# Altium PCB RasPi-BplusHAT-RELAY.PcbDoc
Units mil, origin at the board's own origin, x right, y up, seen from the top; angles counter-clockwise.
Board outline 2560 x 2205 mil, 2 copper layers (Top, Bottom), stack 61.811 mil thick; 65 components, 55 nets, 220 pads, 18 vias.
Unrouted connection lines stored in the file: 1.
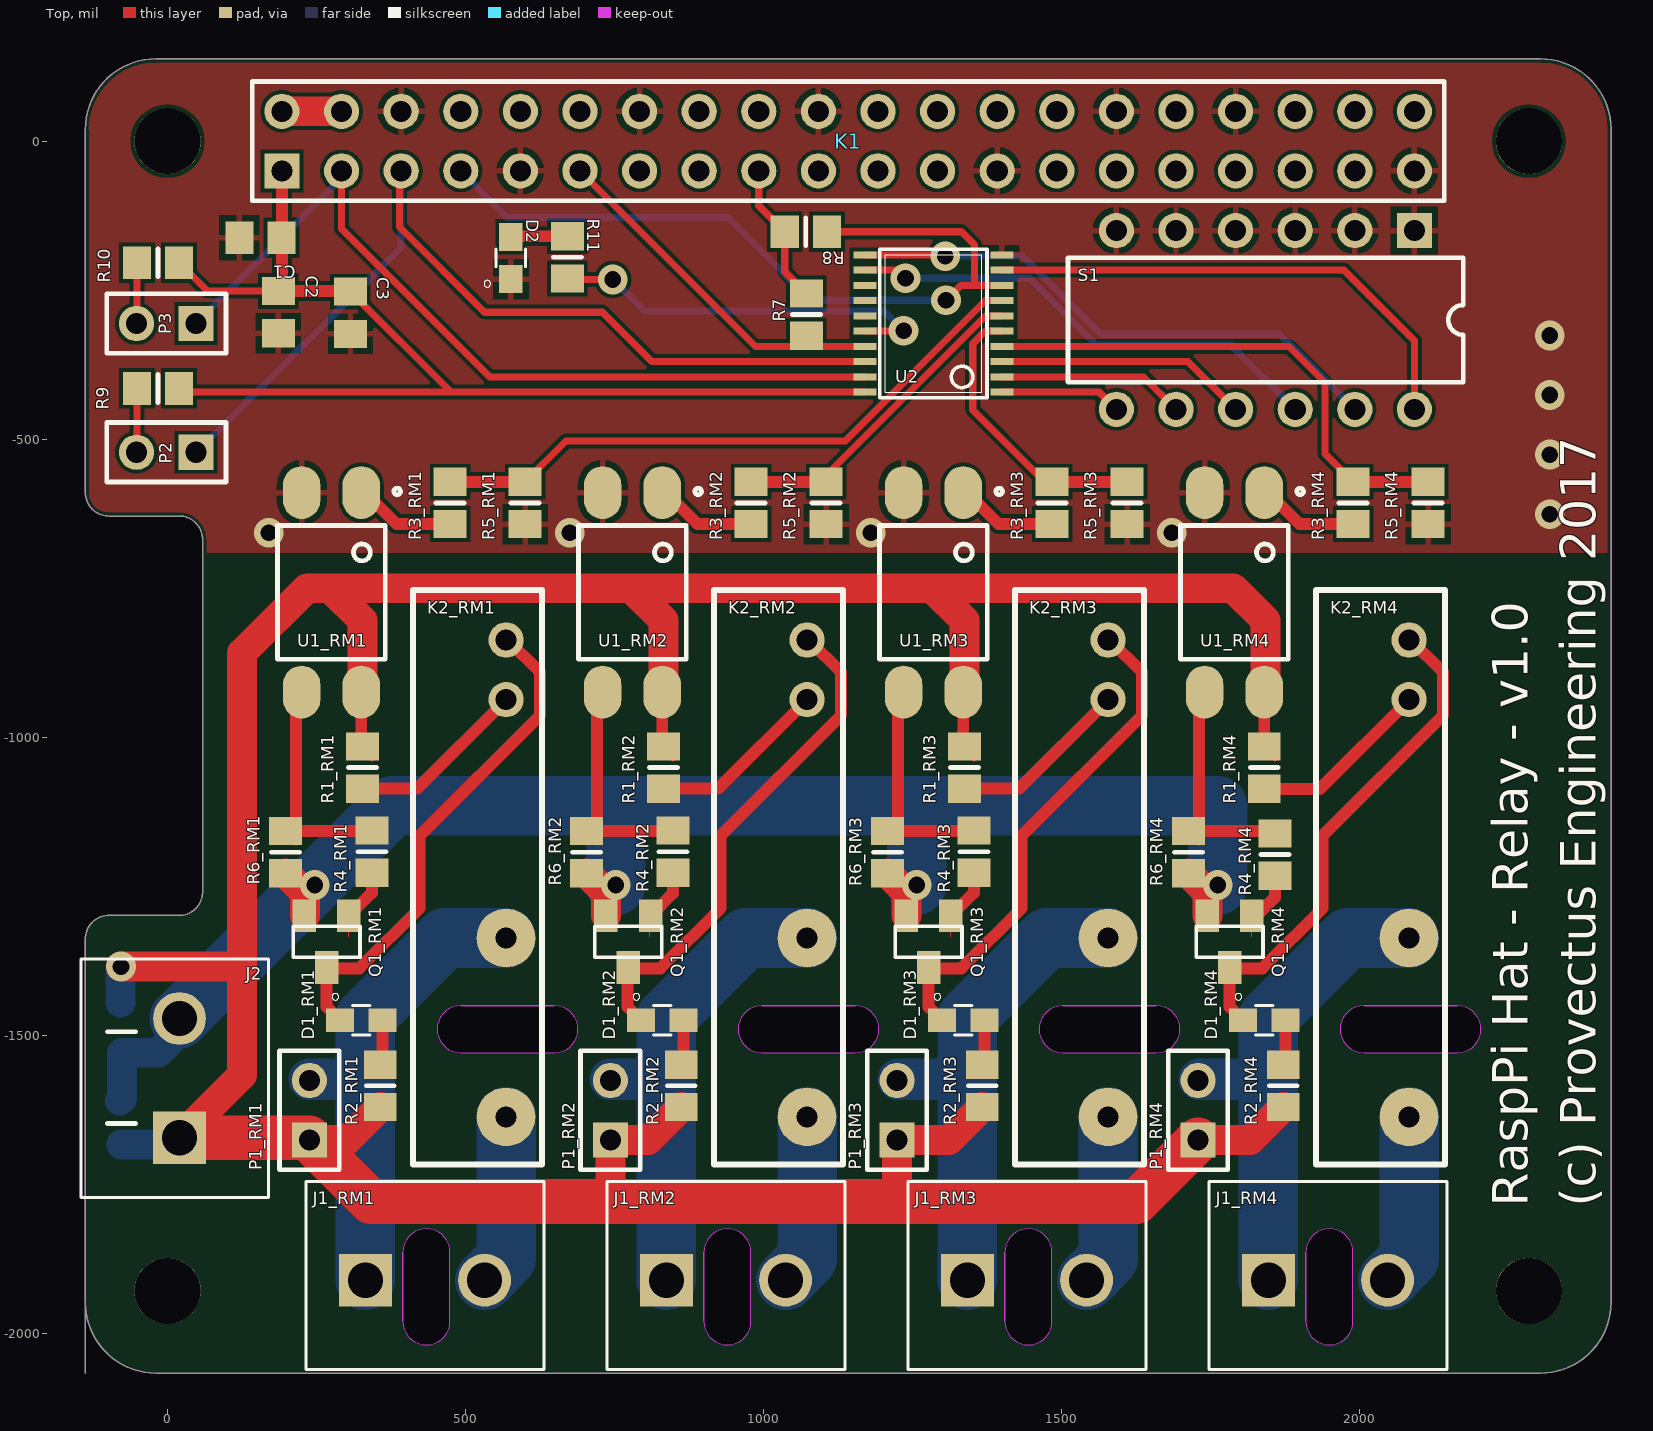
[diagram p0: Top view]
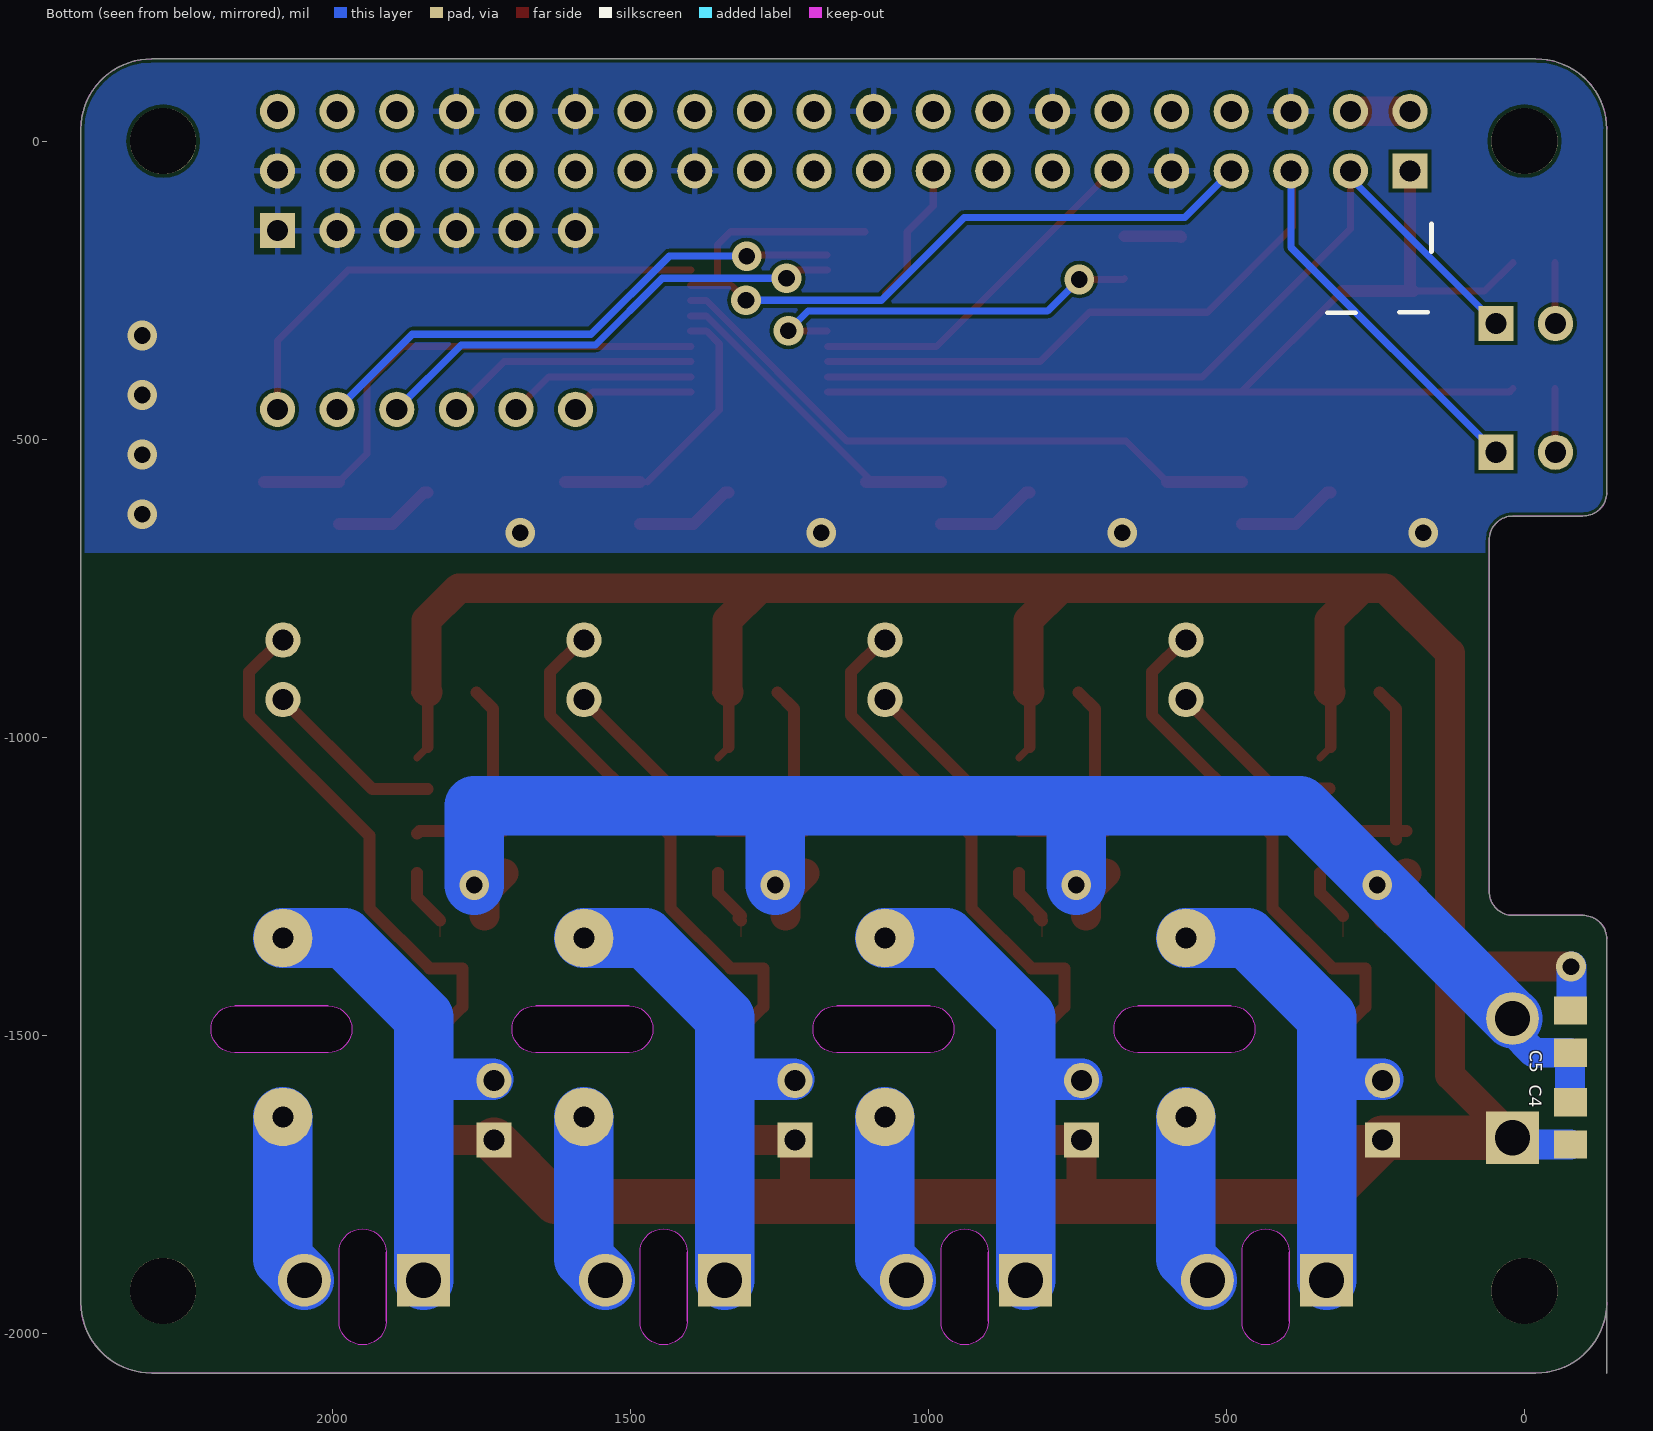
[diagram p1: Bottom view, seen from below]

## Layer stack, top to bottom
Top Solder: solder mask 0.4, Solder Resist, Dk 3.5
Top: signal copper 1.378
Dielectric 1: core 59.0551, FR-4, Dk 4.8
Bottom: signal copper 1.378
Bottom Solder: solder mask 0.4, Solder Resist, Dk 3.5

## Board outline
-138,-1948 ccw(c-19,-1948) -19,-2067 2303,-2067 ccw(c2303,-1948) 2422,-1948 2422,20 ccw(c2303.5,19.5) 2303,138 -19,138 ccw(c-19.5,19.5) -138,20 -138,-590 ccw(c-98.5,-589.5) -98,-629 20,-629 cw(c19.5,-668.5) 59,-669 59,-1259 cw(c19.5,-1259.5) 20,-1299 -98,-1299 ccw(c-98.5,-1338.5) -138,-1338 -138,-2067
cut-out: 649.19,-1450.63 491.71,-1450.63 ccw(c491.71,-1490) 491.71,-1529.37 649.19,-1529.37 ccw(c649.19,-1490)
cut-out: 1154.19,-1450.63 996.71,-1450.63 ccw(c996.71,-1490) 996.71,-1529.37 1154.19,-1529.37 ccw(c1154.19,-1490)
cut-out: 1659.19,-1450.63 1501.71,-1450.63 ccw(c1501.71,-1490) 1501.71,-1529.37 1659.19,-1529.37 ccw(c1659.19,-1490)
cut-out: 2164.19,-1450.63 2006.71,-1450.63 ccw(c2006.71,-1490) 2006.71,-1529.37 2164.19,-1529.37 ccw(c2164.19,-1490)
cut-out: 395.06,-1980.25 ccw(c434.43,-1980.25) 473.8,-1980.25 473.8,-1864 ccw(c434.43,-1864) 395.06,-1864
cut-out: 900.06,-1980.25 ccw(c939.43,-1980.25) 978.8,-1980.25 978.8,-1864 ccw(c939.43,-1864) 900.06,-1864
cut-out: 1405.06,-1980.25 ccw(c1444.43,-1980.25) 1483.8,-1980.25 1483.8,-1864 ccw(c1444.43,-1864) 1405.06,-1864
cut-out: 1910.06,-1980.25 ccw(c1949.43,-1980.25) 1988.8,-1980.25 1988.8,-1864 ccw(c1949.43,-1864) 1910.06,-1864

## Design rules (kind name [scope] priority, off if disabled: settings)
Clearance mdViaVia [IsVia vs IsVia] p1: gap=6
Clearance mdPadVia [IsPad vs IsVia] p2: gap=6
Clearance mdPadPad [IsPad vs IsPad] p3: gap=6
Clearance mdWireVia [(InLayerClass('Signal Layers') AND IsTrack) vs IsVia] p4: gap=6
Clearance mdWirePad [(InLayerClass('Signal Layers') AND IsTrack) vs IsPad] p5: gap=6
Clearance mdWireWire [(InLayerClass('Signal Layers') AND IsTrack) vs (InLayerClass('Signal Layers') AND IsTrack)] p6: gap=6
Clearance [All] p7: gap=6
HoleSize [All] p1: absolutevalues=TRUE maxlimit=100000 minlimit=12 maxpercent=80.000 minpercent=20.000
HoleToHoleClearance [All] p1: gap=8 allowstackedmicrovias=TRUE
PolygonConnect ThermalVias [IsVia] p1: connectstyle=Direct reliefconductorwidth=10 reliefentries=4 polygonreliefangle="90 Angle" airgapwidth=10
PolygonConnect [All] p2: connectstyle=Relief reliefconductorwidth=10 reliefentries=4 polygonreliefangle="90 Angle" airgapwidth=10
RoomDefinition RasPi-BplusHAT-RELAY [InComponentClass('RasPi-BplusHAT-RELAY')] p1: confinementstyle=ConfineIn formatcopy=TRUE lockcomponents=FALSE outline -164,-2093 2447,-2093 2447,156 -164,156
RoomDefinition RM1 [InComponentClass('RM1')] p2: confinementstyle=ConfineIn formatcopy=TRUE lockcomponents=FALSE outline 155,-2067 660,-2067 660,-478 155,-478
RoomDefinition RM2 [InComponentClass('RM2')] p3: confinementstyle=ConfineIn formatcopy=TRUE lockcomponents=FALSE outline 660,-2067 1165,-2067 1165,-478 660,-478
RoomDefinition RM4 [InComponentClass('RM4')] p4: confinementstyle=ConfineIn formatcopy=TRUE lockcomponents=FALSE outline 1670,-2067 2175,-2067 2175,-478 1670,-478
RoomDefinition RM3 [InComponentClass('RM3')] p5: confinementstyle=ConfineIn formatcopy=TRUE lockcomponents=FALSE outline 1165,-2067 1670,-2067 1670,-478 1165,-478
RoutingVias [All] p1: holewidth=28 width=50 viastyle="Through Hole" minholewidth=28 minwidth=50 maxholewidth=28 maxwidth=50
SilkToSilkClearance [All] p1 off: silktosilkclearance=10
SilkToSolderMaskClearance [IsPad] p1 off: minsilkscreentomaskgap=10 clearancetoexposedcopper=TRUE
SolderMaskExpansion [All] p1: expansion=2
Width [All] p1: maxlimit=100000 minlimit=6 preferedwidth=10
26 further rules are at their usual default settings.

## Classes and differential pairs
component class RasPi-BplusHAT-RELAY: C1 C2 C3 C4 C5 D2 J1 J2 K1 P2 P3 R7 R8 R9 R10 R11 S1 U2
channel class RelayPowerStage: RM1 RM2 RM3 RM4
component class RM4: D1_RM4 J1_RM4 K2_RM4 P1_RM4 Q1_RM4 R1_RM4 R2_RM4 R3_RM4 R4_RM4 R5_RM4 R6_RM4 U1_RM4
component class RM3: D1_RM3 J1_RM3 K2_RM3 P1_RM3 Q1_RM3 R1_RM3 R2_RM3 R3_RM3 R4_RM3 R5_RM3 R6_RM3 U1_RM3
component class RM2: D1_RM2 J1_RM2 K2_RM2 P1_RM2 Q1_RM2 R1_RM2 R2_RM2 R3_RM2 R4_RM2 R5_RM2 R6_RM2 U1_RM2
component class RM1: D1_RM1 J1_RM1 K2_RM1 P1_RM1 Q1_RM1 R1_RM1 R2_RM1 R3_RM1 R4_RM1 R5_RM1 R6_RM1 U1_RM1

## Components (designator, comment, footprint, x,y, rotation, side; value= is the part's Value field where it differs from the comment)
C1 "Cap" 6-0805_N#1 156,-162 r180 top
C2 "Cap" 6-0805_N#1 186,-287 r270 top
C3 "Cap" 6-0805_N#1 307,-288 r270 top
C4 "Cap" 6-0805_N#1 -77,-1494 r270 bottom
C5 "Cap" 6-0805_N#1 -77,-1648 r90 bottom
D1_RM1 "0805_LED" LEDSC200X125X70-2N_598-8160-107F(Primary) 325,-1475 r0 top (schematic designator D1)
D1_RM2 "0805_LED" LEDSC200X125X70-2N_598-8160-107F(Primary) 830,-1475 r0 top (schematic designator D1)
D1_RM3 "0805_LED" LEDSC200X125X70-2N_598-8160-107F(Primary) 1335,-1475 r0 top (schematic designator D1)
D1_RM4 "0805_LED" LEDSC200X125X70-2N_598-8160-107F(Primary) 1840,-1475 r0 top (schematic designator D1)
D2 "0805_LED" LEDSC200X125X70-2N_598-8160-107F(Primary) 576,-196 r90 top
J1_RM1 "1760510000" 1760490000 332,-1911 r0 top (schematic designator J1)
J1_RM2 "1760510000" 1760490000 837,-1911 r0 top (schematic designator J1)
J1_RM3 "1760510000" 1760490000 1342,-1911 r0 top (schematic designator J1)
J1_RM4 "1760510000" 1760490000 1847,-1911 r0 top (schematic designator J1)
J2 "1760510000" 1760490000 20,-1672 r90 top
K1 "PIN20X2" HDR2X20 192,-50 r0 top
K2_RM1 "G3MB-202P" G3MB-202P 568,-837 r270 top (schematic designator K2)
K2_RM2 "G3MB-202P" G3MB-202P 1073,-837 r270 top (schematic designator K2)
K2_RM3 "G3MB-202P" G3MB-202P 1578,-837 r270 top (schematic designator K2)
K2_RM4 "G3MB-202P" G3MB-202P 2083,-837 r270 top (schematic designator K2)
P1_RM1 "Header 2" HDR1X2 238,-1676 r90 top (schematic designator P1)
P1_RM2 "Header 2" HDR1X2 743,-1676 r90 top (schematic designator P1)
P1_RM3 "Header 2" HDR1X2 1224,-1676 r90 top (schematic designator P1)
P1_RM4 "Header 2" HDR1X2 1729,-1676 r90 top (schematic designator P1)
P2 "Header 2" HDR1X2 48,-522 r180 top
P3 "Header 2" HDR1X2 48,-306 r180 top
Q1_RM1 "MMBT2222A" SOT23 267,-1343 r180 top (schematic designator Q1)
Q1_RM2 "MMBT2222A" SOT23 773,-1343 r180 top (schematic designator Q1)
Q1_RM3 "MMBT2222A" SOT23 1277,-1343 r180 top (schematic designator Q1)
Q1_RM4 "MMBT2222A" SOT23 1782,-1343 r180 top (schematic designator Q1)
R1_RM1 "Res1" 6-0805_N#2 327,-1051 r270 top (schematic designator R1)
R1_RM2 "Res1" 6-0805_N#2 832,-1051 r270 top (schematic designator R1)
R1_RM3 "Res1" 6-0805_N#2 1337,-1051 r270 top (schematic designator R1)
R1_RM4 "Res1" 6-0805_N#2 1840,-1051 r270 top (schematic designator R1)
R2_RM1 "Res1" 6-0805_N#2 357,-1585 r90 top (schematic designator R2)
R2_RM2 "Res1" 6-0805_N#2 862,-1585 r90 top (schematic designator R2)
R2_RM3 "Res1" 6-0805_N#2 1367,-1585 r90 top (schematic designator R2)
R2_RM4 "Res1" 6-0805_N#2 1872,-1585 r90 top (schematic designator R2)
R3_RM1 "Res1" 6-0805_N#2 474,-607 r270 top (schematic designator R3)
R3_RM2 "Res1" 6-0805_N#2 979,-607 r270 top (schematic designator R3)
R3_RM3 "Res1" 6-0805_N#2 1484,-607 r270 top (schematic designator R3)
R3_RM4 "Res1" 6-0805_N#2 1989,-607 r270 top (schematic designator R3)
R4_RM1 "Res1" 6-0805_N#2 343,-1192 r270 top (schematic designator R4)
R4_RM2 "Res1" 6-0805_N#2 848,-1192 r270 top (schematic designator R4)
R4_RM3 "Res1" 6-0805_N#2 1353,-1192 r270 top (schematic designator R4)
R4_RM4 "Res1" 6-0805_N#2 1858,-1197 r270 top (schematic designator R4)
R5_RM1 "Res1" 6-0805_N#2 600,-607 r270 top (schematic designator R5)
R5_RM2 "Res1" 6-0805_N#2 1105,-607 r270 top (schematic designator R5)
R5_RM3 "Res1" 6-0805_N#2 1610,-607 r270 top (schematic designator R5)
R5_RM4 "Res1" 6-0805_N#2 2115,-607 r270 top (schematic designator R5)
R6_RM1 "Res1" 6-0805_N#2 198,-1193 r270 top (schematic designator R6)
R6_RM2 "Res1" 6-0805_N#2 703,-1193 r270 top (schematic designator R6)
R6_RM3 "Res1" 6-0805_N#2 1208,-1193 r270 top (schematic designator R6)
R6_RM4 "Res1" 6-0805_N#2 1713,-1193 r270 top (schematic designator R6)
R7 "Res1" 6-0805_N#2 1072,-291 r270 top
R8 "Res1" 6-0805_N#2 1071,-152 r0 top
R9 "Res1" 6-0805_N#2 -16,-415 r180 top
R10 "Res1" 6-0805_N#2 -16,-204 r180 top
R11 "Res1" 6-0805_N#2 671,-195 r90 top
S1 "SW DIP-6" DIP-12/SW 1842,-300 r180 top
U1_RM1 "PC817X2NIP0F" SOT254P975X400-4N 275,-757 r270 top (schematic designator U1)
U1_RM2 "PC817X2NIP0F" SOT254P975X400-4N 780,-757 r270 top (schematic designator U1)
U1_RM3 "PC817X2NIP0F" SOT254P975X400-4N 1285,-757 r270 top (schematic designator U1)
U1_RM4 "PC817X2NIP0F" SOT254P975X400-4N 1790,-757 r270 top (schematic designator U1)
U2 "PCA9501" TSSOP20 1285,-306 r90 top

## Footprints (in the part's own frame and the unit in brackets; to place one, negate y for a bottom-side part, rotate by r counter-clockwise, add the part's x,y. Pads: shape width x height; smd on the part's side, far side on the other; paste and mask are expansions set on the pad)
6-0805_N#1 [mm] "Chip Resistor, Body 2.0x1.2mm, IPC Medium Density"
  rect 1.2x1.4 smd: 1(0.9,0) 2(-0.9,0)
  body extent -1.07,-0.7 1.07,0.7, height 0.7
6-0805_N#2 [mm] "Chip Resistor, Body 2.0x1.2mm, IPC Medium Density"
  rect 1.2x1.4 smd: 1(-0.9,0) 2(0.9,0)
  silkscreen extent 0,-0.6 0,0.6, body extent -1.07,-0.7 1.07,0.7, height 0.7
1760490000 [mm]
  rect 2.25x2.25 hole 1.5 mask-25.4: 1(0,0)
  round 2.25 hole 1.5 mask-25.4: 2(5.08,0)
  silkscreen extent -2.54,-3.8 7.62,4.2
DIP-12/SW [mm] "DIP Switch; 12 Leads"
  rect 1.5x1.5 hole 0.9: 1(-6.35,-3.81)
  round 1.5 hole 0.9: 2(-3.81,-3.81) 3(-1.27,-3.81) 4(1.27,-3.81) 5(3.81,-3.81) 6(6.35,-3.81) 7(6.35,3.81) 8(3.81,3.81) 9(1.27,3.81) 10(-1.27,3.81) 11(-3.81,3.81) 12(-6.35,3.81)
  silkscreen extent -8.43,-2.65 8.41,2.65
G3MB-202P [mm]
  round 2.5 hole 0.9: 1(20.32,0) 2(12.7,0)
  round 1.5 hole 0.9: 3(2.54,0) 4(0,0)
  silkscreen extent -2.14,-3.96 22.36,1.54, body extent -2.1,-3.9 22.3,1.5, height 20.5
HDR1X2 [mm] "Connector; Header; 2 Position"
  rect 1.5x1.5 hole 0.9: 1(0,0)
  round 1.5 hole 0.9: 2(2.54,0)
  silkscreen extent -1.27,-1.27 3.81,1.27
HDR2X20 [mm] "Connector; Header; 20x2 Position"
  rect 1.5x1.5 hole 0.9: 1(0,0)
  round 1.5 hole 0.9: 2(0,2.54) 3(2.54,0) 4(2.54,2.54) 5(5.08,0) 6(5.08,2.54) 7(7.62,0) 8(7.62,2.54) 9(10.16,0) 10(10.16,2.54) 11(12.7,0) 12(12.7,2.54) 13(15.24,0) 14(15.24,2.54) 15(17.78,0) 16(17.78,2.54) 17(20.32,0) 18(20.32,2.54) 19(22.86,0) 20(22.86,2.54) 21(25.4,0) 22(25.4,2.54) 23(27.94,0) 24(27.94,2.54) 25(30.48,0) 26(30.48,2.54) 27(33.02,0) 28(33.02,2.54) 29(35.56,0) 30(35.56,2.54) 31(38.1,0) 32(38.1,2.54) 33(40.64,0) 34(40.64,2.54) 35(43.18,0) 36(43.18,2.54) 37(45.72,0) 38(45.72,2.54) 39(48.26,0) 40(48.26,2.54)
  silkscreen extent -1.27,-1.27 49.53,3.81
LEDSC200X125X70-2N_598-8160-107F(Primary) [mm]
  rect 1.2x1 smd paste-25.4 mask-25.4: A(0.9,0) C(-0.9,0)
  silkscreen extent -1.24,-0.63 0.38,1.14
SOT23 [mm]
  rect 1x1.4 smd paste-25.4 mask-25.4: 1(-0.95,-1.1) 2(0.95,-1.1) 3(0,1.1)
  silkscreen extent -1.42,-0.66 1.42,0.66
SOT254P975X400-4N [mm]
  oval 2.25x1.6 smd paste-25.4: 1(-4.25,1.27) 2(-4.25,-1.27) 3(4.25,-1.27) 4(4.25,1.27)
  silkscreen extent -4.44,-2.3 2.85,2.94
TSSOP20 [mil]
  rect 12x39 smd paste-1000 mask-1000: 1(-115.16,-114.87) 2(-89.57,-114.87) 3(-63.98,-114.87) 4(-38.39,-114.87) 5(-12.8,-114.87) 6(12.8,-114.87) 7(38.39,-114.87) 8(63.98,-114.87) 9(89.57,-114.87) 10(115.16,-114.87) 11(115.16,114.87) 12(89.57,114.87) 13(63.98,114.87) 14(38.39,114.87) 15(12.8,114.87) 16(-12.8,114.87) 17(-38.39,114.87) 18(-63.98,114.87) 19(-89.57,114.87) 20(-115.16,114.87)
  silkscreen extent -125,-90 125,90

## Part data
C1 C2 C3 C4 C5: "Capacitor"
D1_RM1 D1_RM2 D1_RM3 D1_RM4 D2: library part 598-8160-107F, "LED, SMD; 0805; Yellow-Green; Water Clear Lens; 40mcd; 570/575nm"
J1_RM1 J1_RM2 J1_RM3 J1_RM4 J2: "Conn Terminal Block 2 POS 5.08mm Solder ST Thru-Hole 16A"
P1_RM1 P1_RM2 P1_RM3 P1_RM4 P2 P3: "Header, 2-Pin"
Q1_RM1 Q1_RM2 Q1_RM3 Q1_RM4: "MMBT2222 Series 40 V CE Breakdown 1 A NPN General Purpose Amplifier - SOT-23"
R1_RM1 R1_RM2 R1_RM3 R1_RM4 R2_RM1 R2_RM2 R2_RM3 R2_RM4 R3_RM1 R3_RM2 R3_RM3 R3_RM4 R4_RM1 R4_RM2 R4_RM3 R4_RM4 R5_RM1 R5_RM2 R5_RM3 R5_RM4 R6_RM1 R6_RM2 R6_RM3 R6_RM4 R7 R8 R9 R10 R11: "Resistor"
S1: "DIP Switch, 6 Position, SPST"
U1_RM1 U1_RM2 U1_RM3 U1_RM4: "PC817 Series 1 Channel 80 V 5000 Vrms General Purpose Photocoupler - DIP-4"

## Free pads (board coordinates)
  round 111 hole 111: 1(0,-1929) 1(0,0) 1(2284,-1929) 1(2284,0)

## Via types
v1: diameter 50, hole 28, Top to Bottom, 18 vias

## Nets (pads, with @x,y where several pads share a name; then routed paths per layer and width w, separated by ;. In a path a pad name is that pad's centre, name@x,y a point inside that pad or via, vN(x,y) a via of type N, cw(c..) or ccw(c..) an arc to the next point about the centre after c; other vN are vias at no path point)
+3V3: C1.2 C2.2 C3.2 K1.1 K1.17 R7.1 R8.1 R9.1 R10.1 U2.20 | length 2139.9
  Top w12: R9.1 25.59,-421.16 U2.20@1169.13,-421.16 ; R10.1 67,-251.57 C2.2 ; C3.2 474.72,-420.28 ; K1.17 992,-108.43 R8.1 1035.57,-219.13 R7.1
  Top w20: K1.1 192,-245.57 C2.2 306,-251.57 C3.2
+5V: K1.2 K1.4 | length 100
  Top w50: K1.2 K1.4
EEPROM_WC: K1.11 R7.2 U2.17 | length 599.1
  Top w12: K1.11 986.39,-344.39 U2.17@1169.13,-344.39
EXT_VCC: C4.2 C5.2 J2.1 P1_RM1.1 P1_RM2.1 P1_RM3.1 P1_RM4.1 R1_RM1.1 R1_RM2.1 R1_RM3.1 R1_RM4.1 R2_RM1.1 R2_RM2.1 R2_RM3.1 R2_RM4.1 U1_RM1.4 U1_RM2.4 U1_RM3.4 U1_RM4.4 | length 6797
  Top w12: R1_RM1.1@325,-1016.57 R1_RM1.1@343,-1034.57 ; R1_RM2.1@830,-1016.57 R1_RM2.1@848,-1034.57 ; R1_RM3.1@1335,-1016.57 R1_RM3.1@1353,-1034.57 ; R1_RM4.1@1840,-1016.57 R1_RM4.1@1858,-1034.57
  Top w20: R1_RM1.1@325,-1016.57 325,-943.32 U1_RM1.4@343,-925.32 ; R1_RM2.1@830,-1016.57 830,-943.32 U1_RM2.4@848,-925.32 ; R1_RM3.1@1335,-1016.57 1335,-943.32 U1_RM3.4@1353,-925.32 ; R1_RM4.1@1840,-1016.57 1840,-943.32 U1_RM4.4@1858,-925.32
  Top w50: v1(-78,-1385) 124,-1385 ; J2.1 125,-1567 125,-859 234,-750 1788,-750 1842,-804 1842,-922.32 U1_RM4.4 ; P1_RM1.1 301.43,-1676 R2_RM1.1 ; 273,-750 327,-804 327,-922.32 U1_RM1.4 ; 743,-1779 P1_RM2.1 806.43,-1676 R2_RM2.1 ; 778,-750 832,-804 832,-922.32 U1_RM2.4 ; 1224,-1744 P1_RM3.1 1311.43,-1676 R2_RM3.1 ; 1283,-750 1337,-804 1337,-922.32 U1_RM3.4 ; P1_RM4.1 1816.43,-1676 R2_RM4.1
  Top w75: J2.1 P1_RM1.1@238,-1672 ; P1_RM1.1 341,-1779 743,-1779 1626,-1779 P1_RM4.1
  Bottom w50: C4.2@-79,-1445.57 v1@-79,-1385 ; C5.2 8.57,-1683.43 J2.1
GND: C1.1 C2.1 C3.1 D2.C K1.6 K1.9 K1.14 K1.20 K1.25 K1.30 K1.34 K1.39 R5_RM1.2 R5_RM2.2 R5_RM3.2 R5_RM4.2 S1.1 S1.2 S1.3 S1.4 S1.5 S1.6 U1_RM1.2 U1_RM2.2 U1_RM3.2 U1_RM4.2 U2.10
  other v1: 170,-657 675,-657 1180,-657 1685,-657 2319,-626 2319,-526 2319,-426 2319,-326
INTERRUPT: K1.7 R8.2 U2.8 | length 1331.8
  Top w12: R8.2 1332,-152 1354,-174 1354,-242.02 ; v1(1306,-267) 1330.98,-242.02 1354,-242.02 ; U2.8@1398.87,-242.02 1354,-242.02
  Bottom w12: K1.7 570,-128 940,-128 1079,-267 v1(1306,-267)
NetD1_RM1_A: D1_RM1.A R2_RM1.2 | length 76
  Top w20: R2_RM1.2 360.43,-1546.13 D1_RM1.A
NetD1_RM1_C: D1_RM1.C K2_RM1.4 Q1_RM1.3 | length 848.8
  Top w20: D1_RM1.C 267,-1452.43 267,-1388 322,-1388 423,-1287 423,-1165 625,-963 625,-891 K2_RM1.4@572,-838
NetD1_RM2_A: D1_RM2.A R2_RM2.2 | length 76
  Top w20: R2_RM2.2 865.43,-1546.13 D1_RM2.A
NetD1_RM2_C: D1_RM2.C K2_RM2.4 Q1_RM2.3 | length 848.8
  Top w20: D1_RM2.C 772,-1452.43 772,-1388 827,-1388 928,-1287 928,-1165 1130,-963 1130,-891 K2_RM2.4@1077,-838
NetD1_RM3_A: D1_RM3.A R2_RM3.2 | length 76
  Top w20: R2_RM3.2 1370.43,-1546.13 D1_RM3.A
NetD1_RM3_C: D1_RM3.C K2_RM3.4 Q1_RM3.3 | length 848.8
  Top w20: D1_RM3.C 1277,-1452.43 1277,-1388 1332,-1388 1433,-1287 1433,-1165 1635,-963 1635,-891 K2_RM3.4@1582,-838
NetD1_RM4_A: D1_RM4.A R2_RM4.2 | length 76
  Top w20: R2_RM4.2 1875.43,-1546.13 D1_RM4.A
NetD1_RM4_C: D1_RM4.C K2_RM4.4 Q1_RM4.3 | length 848.8
  Top w20: D1_RM4.C 1782,-1452.43 1782,-1388 1837,-1388 1938,-1287 1938,-1165 2140,-963 2140,-891 K2_RM4.4@2087,-838
NetD2_A: D2.A R11.2 | length 95.4
  Top w20: D2.A 577,-159.57 R11.2
NetJ1_RM1_1: J1_RM1.1 K2_RM1.2 P1_RM1.2 | length 826.1
  Bottom w70: P1_RM1.2@238,-1574 332,-1574
  Bottom w100: J1_RM1.1 332,-1574 332,-1470 465,-1337 K2_RM1.2
NetJ1_RM1_2: J1_RM1.2 K2_RM1.1 | length 288.9
  Bottom w100: J1_RM1.2 568,-1875 K2_RM1.1
NetJ1_RM2_1: J1_RM2.1 K2_RM2.2 P1_RM2.2 | length 826.1
  Bottom w70: P1_RM2.2@743,-1574 837,-1574
  Bottom w100: J1_RM2.1 837,-1574 837,-1470 970,-1337 K2_RM2.2
NetJ1_RM2_2: J1_RM2.2 K2_RM2.1 | length 288.9
  Bottom w100: J1_RM2.2 1073,-1875 K2_RM2.1
NetJ1_RM3_1: J1_RM3.1 K2_RM3.2 P1_RM3.2 | length 848.1
  Bottom w70: P1_RM3.2@1226,-1574 1342,-1574
  Bottom w100: J1_RM3.1 1342,-1574 1342,-1470 1475,-1337 K2_RM3.2
NetJ1_RM3_2: J1_RM3.2 K2_RM3.1 | length 288.9
  Bottom w100: J1_RM3.2 1578,-1875 K2_RM3.1
NetJ1_RM4_1: J1_RM4.1 K2_RM4.2 P1_RM4.2 | length 848.1
  Bottom w70: P1_RM4.2@1731,-1574 1847,-1574
  Bottom w100: J1_RM4.1 1847,-1574 1847,-1470 1980,-1337 K2_RM4.2
NetJ1_RM4_2: J1_RM4.2 K2_RM4.1 | length 288.9
  Bottom w100: J1_RM4.2 2083,-1875 K2_RM4.1
NetK2_RM1_3: K2_RM1.3 R1_RM1.2 | length 305
  Top w20: R1_RM1.2 418.57,-1086.43 K2_RM1.3 ; K2_RM1.3@570.5,-939.5 K2_RM1.3@572,-938
NetK2_RM2_3: K2_RM2.3 R1_RM2.2 | length 305
  Top w20: R1_RM2.2 923.57,-1086.43 K2_RM2.3 ; K2_RM2.3@1075.5,-939.5 K2_RM2.3@1077,-938
NetK2_RM3_3: K2_RM3.3 R1_RM3.2 | length 305
  Top w20: R1_RM3.2 1428.57,-1086.43 K2_RM3.3 ; K2_RM3.3@1580.5,-939.5 K2_RM3.3@1582,-938
NetK2_RM4_3: K2_RM4.3 R1_RM4.2 | length 307.3
  Top w20: R1_RM4.2@1840,-1087 1933,-1087 K2_RM4.3 ; K2_RM4.3@2085.5,-939.5 K2_RM4.3@2087,-938
NetP2_2: P2.2 R9.2 | length 107.2
  Top w12: P2.2 -51.43,-521.43 R9.2
NetP3_2: P3.2 R10.2 | length 102.2
  Top w12: P3.2 -51.43,-305.43 R10.2
NetQ1_RM1_1: Q1_RM1.1 R4_RM1.2 | length 115.3
  Top w0: 304.4,-1334.69 Q1_RM1.1@304.4,-1307.6
  Top w20: Q1_RM1.1 343,-1261.09 R4_RM1.2
NetQ1_RM2_1: Q1_RM2.1 R4_RM2.2 | length 121.2
  Top w0: 809.4,-1334.69 Q1_RM2.1@809.4,-1307.6
  Top w20: Q1_RM2.1@809.4,-1307.6 Q1_RM2.1@813.85,-1303.15 ; Q1_RM2.1 848,-1262.09 R4_RM2.2
NetQ1_RM3_1: Q1_RM3.1 R4_RM3.2 | length 120.9
  Top w0: 1314.4,-1334.69 Q1_RM3.1@1314.4,-1307.6
  Top w20: Q1_RM3.1@1314.4,-1307.6 Q1_RM3.1@1318.35,-1303.65 ; Q1_RM3.1 1353,-1261.09 R4_RM3.2
NetQ1_RM4_1: Q1_RM4.1 R4_RM4.2 | length 123.2
  Top w0: 1819.4,-1334.69 Q1_RM4.1@1819.4,-1307.6
  Top w20: Q1_RM4.1@1819.4,-1307.6 1858,-1269 R4_RM4.2 R4_RM4.2@1858,-1227.43
NetR3_RM1_1: R3_RM1.1 R5_RM1.1 U2.7 | length 1050.8
  Top w12: R5_RM1.1 668.57,-503 1137,-503 1372.39,-267.61 U2.7@1398.87,-267.61
  Top w20: R3_RM1.1 R5_RM1.1
NetR3_RM1_2: R3_RM1.2 U1_RM1.1 | length 170.9
  Top w20: U1_RM1.1 331.68,-589.68 384.43,-642.43 R3_RM1.2
NetR3_RM2_1: R3_RM2.1 R5_RM2.1 U2.6 | length 537
  Top w12: R5_RM2.1@1100.44,-565.01 1372.25,-293.2 U2.6@1398.87,-293.2
  Top w20: R3_RM2.1 R5_RM2.1
NetR3_RM2_2: R3_RM2.2 U1_RM2.1 | length 170.9
  Top w20: U1_RM2.1 836.68,-589.68 889.43,-642.43 R3_RM2.2
NetR3_RM3_1: R3_RM3.1 R5_RM3.1 U2.5 | length 464.2
  Top w12: U2.5@1398.87,-318.8 1372.12,-318.8 1351,-339.91 1351,-451 R3_RM3.1@1471.57,-571.57
  Top w20: R3_RM3.1 R5_RM3.1
NetR3_RM3_2: R3_RM3.2 U1_RM3.1 | length 170.9
  Top w20: U1_RM3.1 1341.68,-589.68 1394.43,-642.43 R3_RM3.2
NetR3_RM4_1: R3_RM4.1 R5_RM4.1 U2.4 | length 880.3
  Top w12: U2.4@1398.87,-344.39 1881.39,-344.39 1942,-405 1942,-524.57 R3_RM4.1
  Top w20: R3_RM4.1 R5_RM4.1
NetR3_RM4_2: R3_RM4.2 U1_RM4.1 | length 170.9
  Top w20: U1_RM4.1 1846.68,-589.68 1899.43,-642.43 R3_RM4.2
NetR4_RM1_1: R4_RM1.1 R6_RM1.1 U1_RM1.3 | length 403.5
  Top w20: R6_RM1.1 R6_RM1.1@215.57,-1157.57 ; R6_RM1.1@215.57,-1172 R6_RM1.1@215.57,-1157.57 ; U1_RM1.3@243,-925.32 215.57,-952.76 R6_RM1.1@215.57,-1157.57 ; R4_RM1.1 342,-1157.57 R6_RM1.1@215.57,-1157.57
NetR4_RM2_1: R4_RM2.1 R6_RM2.1 U1_RM2.3 | length 403.5
  Top w20: R6_RM2.1 R6_RM2.1@720.57,-1157.57 ; R6_RM2.1@720.57,-1172 R6_RM2.1@720.57,-1157.57 ; U1_RM2.3@748,-925.32 720.57,-952.76 R6_RM2.1@720.57,-1157.57 ; R4_RM2.1 847,-1157.57 R6_RM2.1@720.57,-1157.57
NetR4_RM3_1: R4_RM3.1 R6_RM3.1 U1_RM3.3 | length 403.5
  Top w20: R6_RM3.1 R6_RM3.1@1225.57,-1157.57 ; R6_RM3.1@1225.57,-1172 R6_RM3.1@1225.57,-1157.57 ; U1_RM3.3@1253,-925.32 1225.57,-952.76 R6_RM3.1@1225.57,-1157.57 ; R4_RM3.1 1352,-1157.57 R6_RM3.1@1225.57,-1157.57
NetR4_RM4_1: R4_RM4.1 R6_RM4.1 U1_RM4.3 | length 404.7
  Top w20: R6_RM4.1 R6_RM4.1@1730.57,-1157.57 ; R6_RM4.1@1730.57,-1172 R6_RM4.1@1730.57,-1157.57 ; U1_RM4.3@1758,-925.32 1730.57,-952.76 R6_RM4.1@1730.57,-1157.57 ; R4_RM4.1 1854,-1157.57 R6_RM4.1@1730.57,-1157.57
NetR11_1: R11.1 U2.16 | length 665.5
  Top w12: R11.1 672.57,-232 v1(747,-232) ; U2.16 v1@1234.2,-318.8
  Top w20: v1@1234.2,-318.8 v1(1235,-318)
  Bottom w12: v1(747,-232) 800,-285 1202,-285 v1(1235,-318)
NetS1_7: S1.7 U2.1 | length 205.1
  Top w12: U2.1@1398.87,-421.16 1563.16,-421.16 S1.7
NetS1_8: S1.8 U2.2 | length 315.7
  Top w12: U2.2@1398.87,-395.57 1637.57,-395.57 S1.8
NetS1_9: S1.9 U2.3 | length 426.3
  Top w12: U2.3@1398.87,-369.98 1711.98,-369.98 S1.9
NetS1_10: S1.10 U2.12 | length 825.8
  Top w12: U2.12@1169.13,-216.43 1235.07,-216.43 1238,-219.37 v1(1238,-230)
  Bottom w12: v1(1238,-230) 1446.54,-230 1558.54,-342 1784,-342 S1.10
NetS1_11: S1.11 U2.11 | length 929.2
  Top w12: U2.11 1302.84,-190.84 v1(1305,-193)
  Bottom w12: v1(1305,-193) 1435,-193 1566,-324 1866,-324 S1.11
NetS1_12: S1.12 U2.9 | length 857.2
  Top w12: U2.9@1398.87,-216.43 1973.43,-216.43 2092,-335 S1.12
PGND: C4.1 C5.1 J2.2 Q1_RM1.2 Q1_RM2.2 Q1_RM3.2 Q1_RM4.2 R6_RM1.2 R6_RM2.2 R6_RM3.2 R6_RM4.2 | length 2837.5
  Top w50: R6_RM1.2 230.6,-1261.03 Q1_RM1.2@230.6,-1299.69 ; R6_RM2.2 735.6,-1261.03 Q1_RM2.2 ; R6_RM3.2 1239.6,-1260.03 Q1_RM3.2 ; R6_RM4.2 1744.6,-1260.03 Q1_RM4.2
  Bottom w50: C5.1@-80,-1610 -76.43,-1606.43 -76.43,-1529.43 -15.43,-1529.43 20,-1494 J2.2 ; 752,-1118 755,-1115
  Bottom w100: J2.2 377,-1115 755,-1115 1762,-1115 ; v1(752,-1248) 752,-1118 ; v1(1257,-1248) 1257,-1118 ; v1(1762,-1248) 1762,-1118
  other v1: 247,-1248
SCL: K1.5 P2.1 U2.18 | length 1579.2
  Top w12: K1.5@389,-53 389,-144 532,-287 730,-287 812.98,-369.98 U2.18@1169.13,-369.98
  Bottom w12: P2.1 392,-178 K1.5
SDA: K1.3 P3.1 U2.19 | length 1434.2
  Top w12: K1.3 292,-147 540.57,-395.57 U2.19@1169.13,-395.57
  Bottom w12: P3.1 292,-62 K1.3
pads on no net: K1.8 K1.10 K1.12 K1.13 K1.15 K1.16 K1.18 K1.19 K1.21 K1.22 K1.23 K1.24 K1.26 K1.27 K1.28 K1.29 K1.31 K1.32 K1.33 K1.35 K1.36 K1.37 K1.38 K1.40 U2.13 U2.14 U2.15

## Polygon pours and split planes (outlines as drawn)
GND on Top "Top-No Net" (solid, remove dead copper, pour order 7): -163,157 2447,157 2447,-691 -167,-691
GND on Bottom "Top-No Net" (solid, remove dead copper, pour order 9): -164,159 2446,159 2447,158 2447,-691 -165,-691 -166,-690

## Keep-outs
Keep-Out Layer:
  lines w0: -138,-1948 ccw(c-19,-1948) -19,-2067 2303,-2067 ccw(c2303,-1948) 2422,-1948 2422,20 ccw(c2303.5,19.5) 2303,138 -19,138 ccw(c-19.5,19.5) -138,20 -138,-590 ccw(c-98.5,-589.5) -98,-629 20,-629 cw(c19.5,-668.5) 59,-669 59,-1259 cw(c19.5,-1259.5) 20,-1299 -98,-1299 ccw(c-98.5,-1338.5) -138,-1338 -138,-1948
  lines w2: 395.06,-1980.25 ccw(c434.43,-1980.25) 473.8,-1980.25 473.8,-1864 ccw(c434.43,-1864) 395.06,-1864 395.06,-1980.25 ; 491.71,-1529.37 cw(c491.71,-1490) 491.71,-1450.63 649.19,-1450.63 cw(c649.19,-1490) 649.19,-1529.37 491.71,-1529.37 ; 900.06,-1980.25 ccw(c939.43,-1980.25) 978.8,-1980.25 978.8,-1864 ccw(c939.43,-1864) 900.06,-1864 900.06,-1980.25 ; 996.71,-1529.37 cw(c996.71,-1490) 996.71,-1450.63 1154.19,-1450.63 cw(c1154.19,-1490) 1154.19,-1529.37 996.71,-1529.37 ; 1405.06,-1980.25 ccw(c1444.43,-1980.25) 1483.8,-1980.25 1483.8,-1864 ccw(c1444.43,-1864) 1405.06,-1864 1405.06,-1980.25 ; 1501.71,-1529.37 cw(c1501.71,-1490) 1501.71,-1450.63 1659.19,-1450.63 cw(c1659.19,-1490) 1659.19,-1529.37 1501.71,-1529.37 ; 1910.06,-1980.25 ccw(c1949.43,-1980.25) 1988.8,-1980.25 1988.8,-1864 ccw(c1949.43,-1864) 1910.06,-1864 1910.06,-1980.25 ; 2006.71,-1529.37 cw(c2006.71,-1490) 2006.71,-1450.63 2164.19,-1450.63 cw(c2164.19,-1490) 2164.19,-1529.37 2006.71,-1529.37

## Other copper
Top:
Bottom:

## Silkscreen, mask and mechanical layers (free items; w line width, h text height)
Top Overlay:
  text "RaspPi Hat - Relay - v1.0" at 2282,-1788 h60 r90
  text "(c) Provectus Engineering 2017" at 2396,-1788 h60 r90
Dimension:
  lines w0: -138,-1948 ccw(c-19,-1948) -19,-2067 2303,-2067 ccw(c2303,-1948) 2422,-1948 2422,20 ccw(c2303.5,19.5) 2303,138 -19,138 ccw(c-19.5,19.5) -138,20 -138,-590 ccw(c-98.5,-589.5) -98,-629 20,-629 cw(c19.5,-668.5) 59,-669 59,-1259 cw(c19.5,-1259.5) 20,-1299 -98,-1299 ccw(c-98.5,-1338.5) -138,-1338 -138,-1948
tRestrict:
  circle w123: c0,-1929 r62
  circle w123: c2284,0 r62
  circle w123: c0,0 r62
  circle w123: c2284,-1929 r62
bRestrict:
  circle w123: c2284,0 r62
  circle w123: c0,0 r62
  circle w123: c0,-1929 r62
  circle w123: c2284,-1929 r62
Unrouted:
  lines w0: 192,-50 992,-50 2036,-675 2304,-412 2304,-312 ; 192,50 292,50 ; 1492,-50 2036,-525 2230,-312 ; 1492,50 2036,-575 2230,-412 ; 1881,-703 1949,-815 2073,-815 ; 1881,-653 1875,-815 2049,-924